# Altium PCB BRGTC6_Dual_Daughter.PcbDoc (part 1 of 2)
Units mil, origin at the board's own origin, x right, y up, seen from the top; angles counter-clockwise.
Board outline 5255 x 3080 mil, 4 copper layers (TOP, GND, PWR, BOT), stack 22.334 mil thick; 30 components, 45 nets, 287 pads, 36 vias.
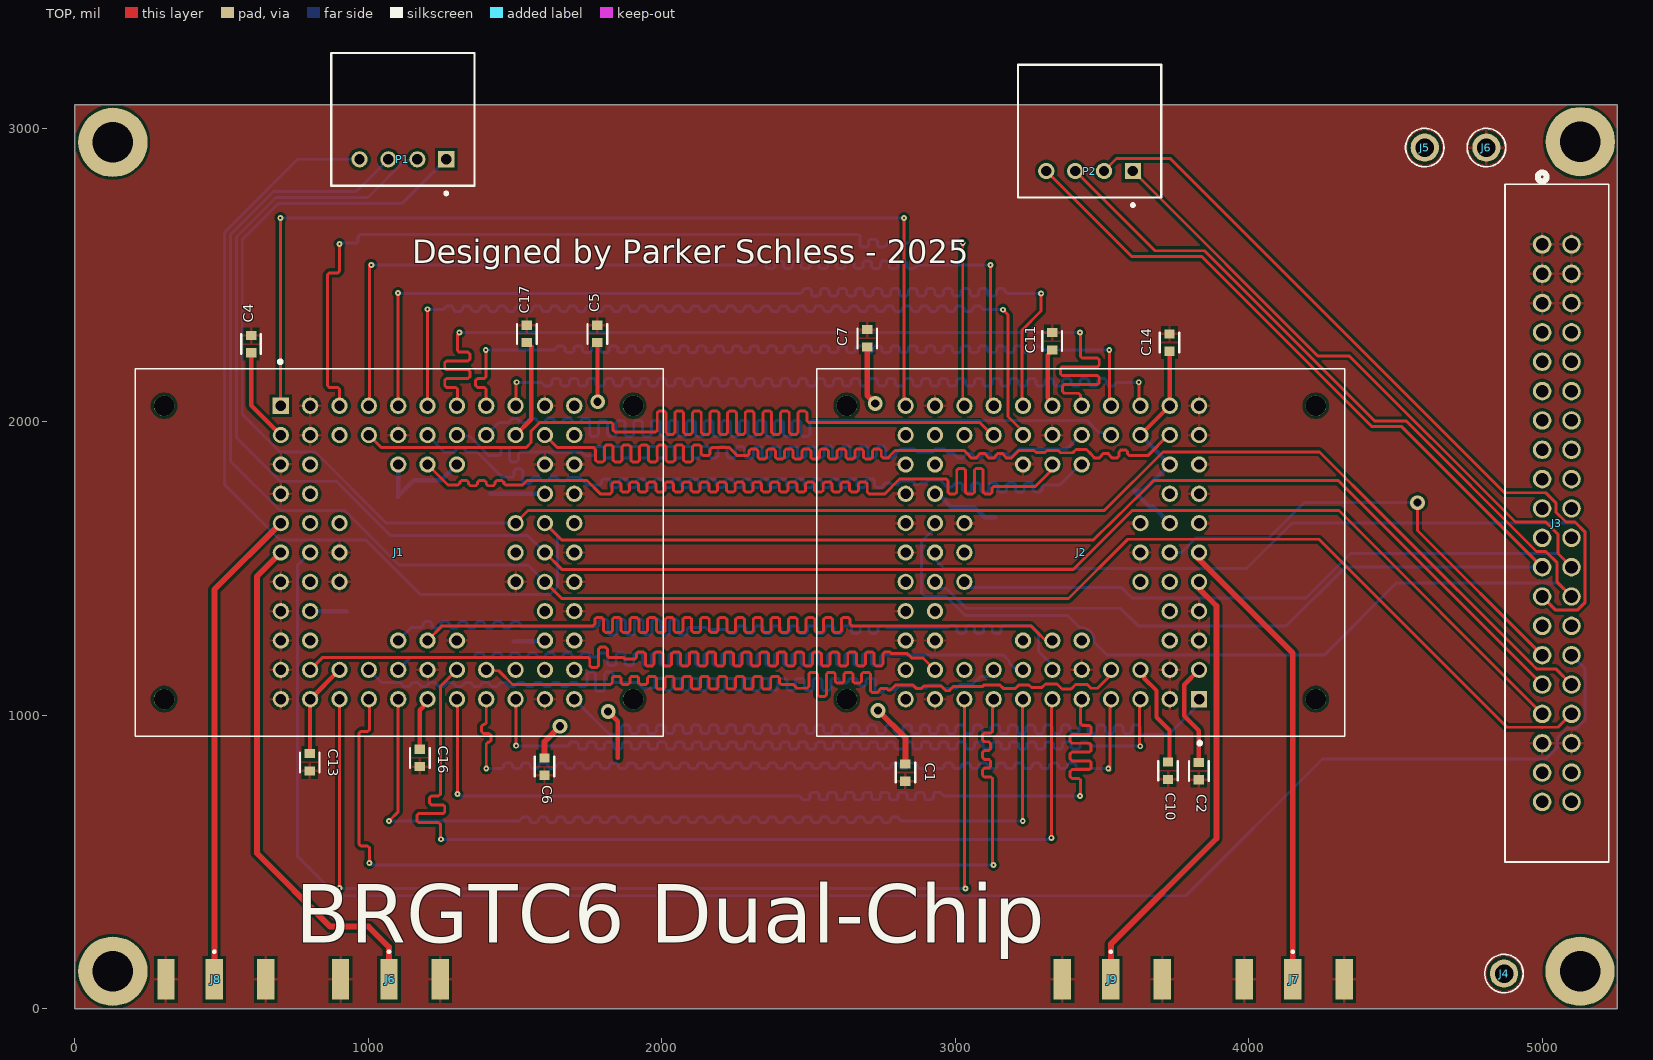
[diagram p0: TOP view]
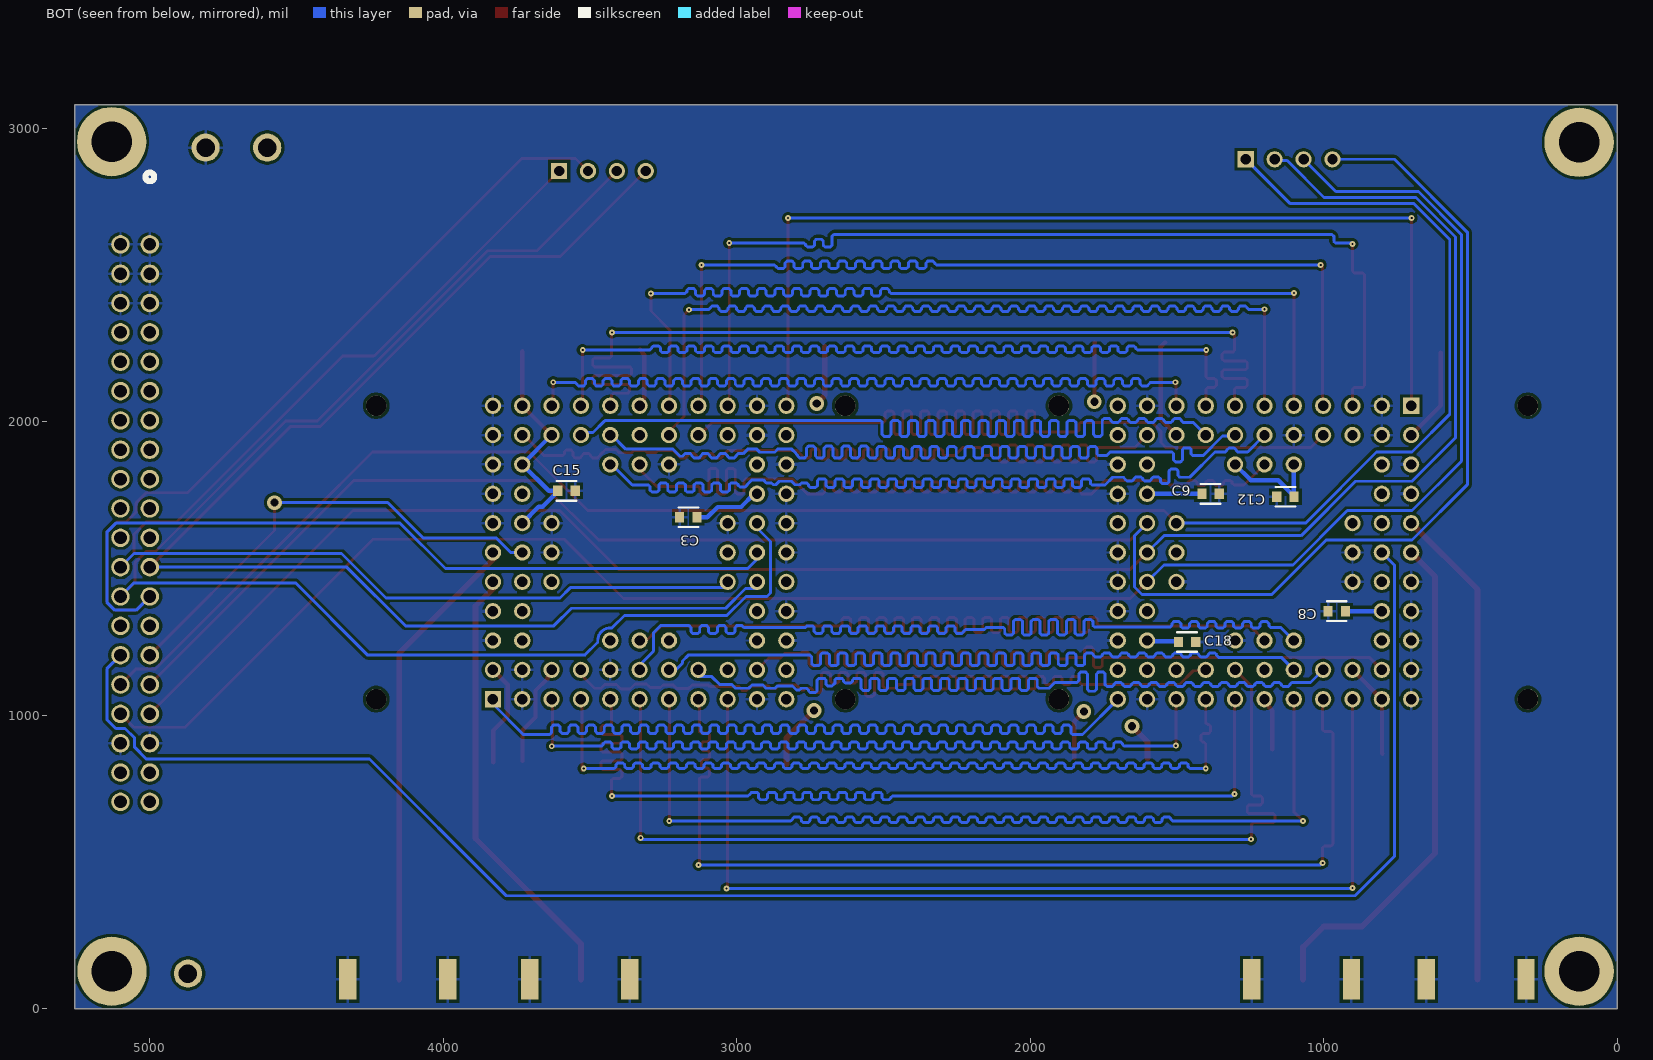
[diagram p1: BOT view, seen from below]
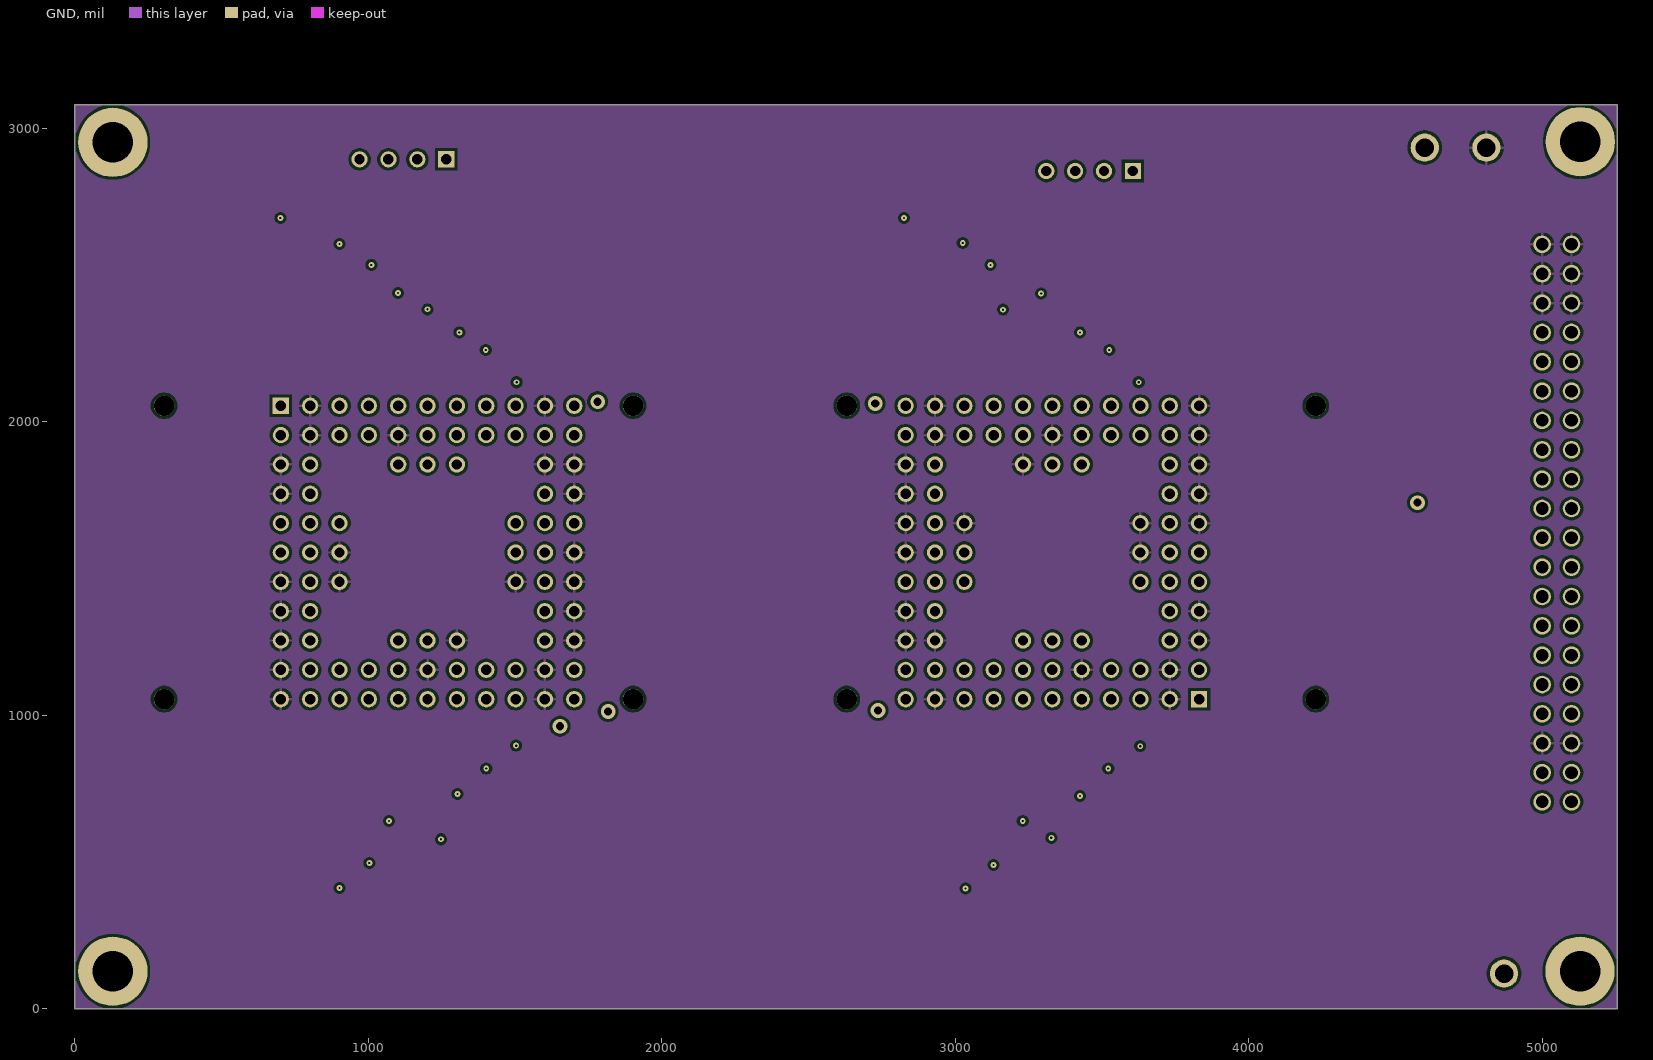
[diagram p2: GND]
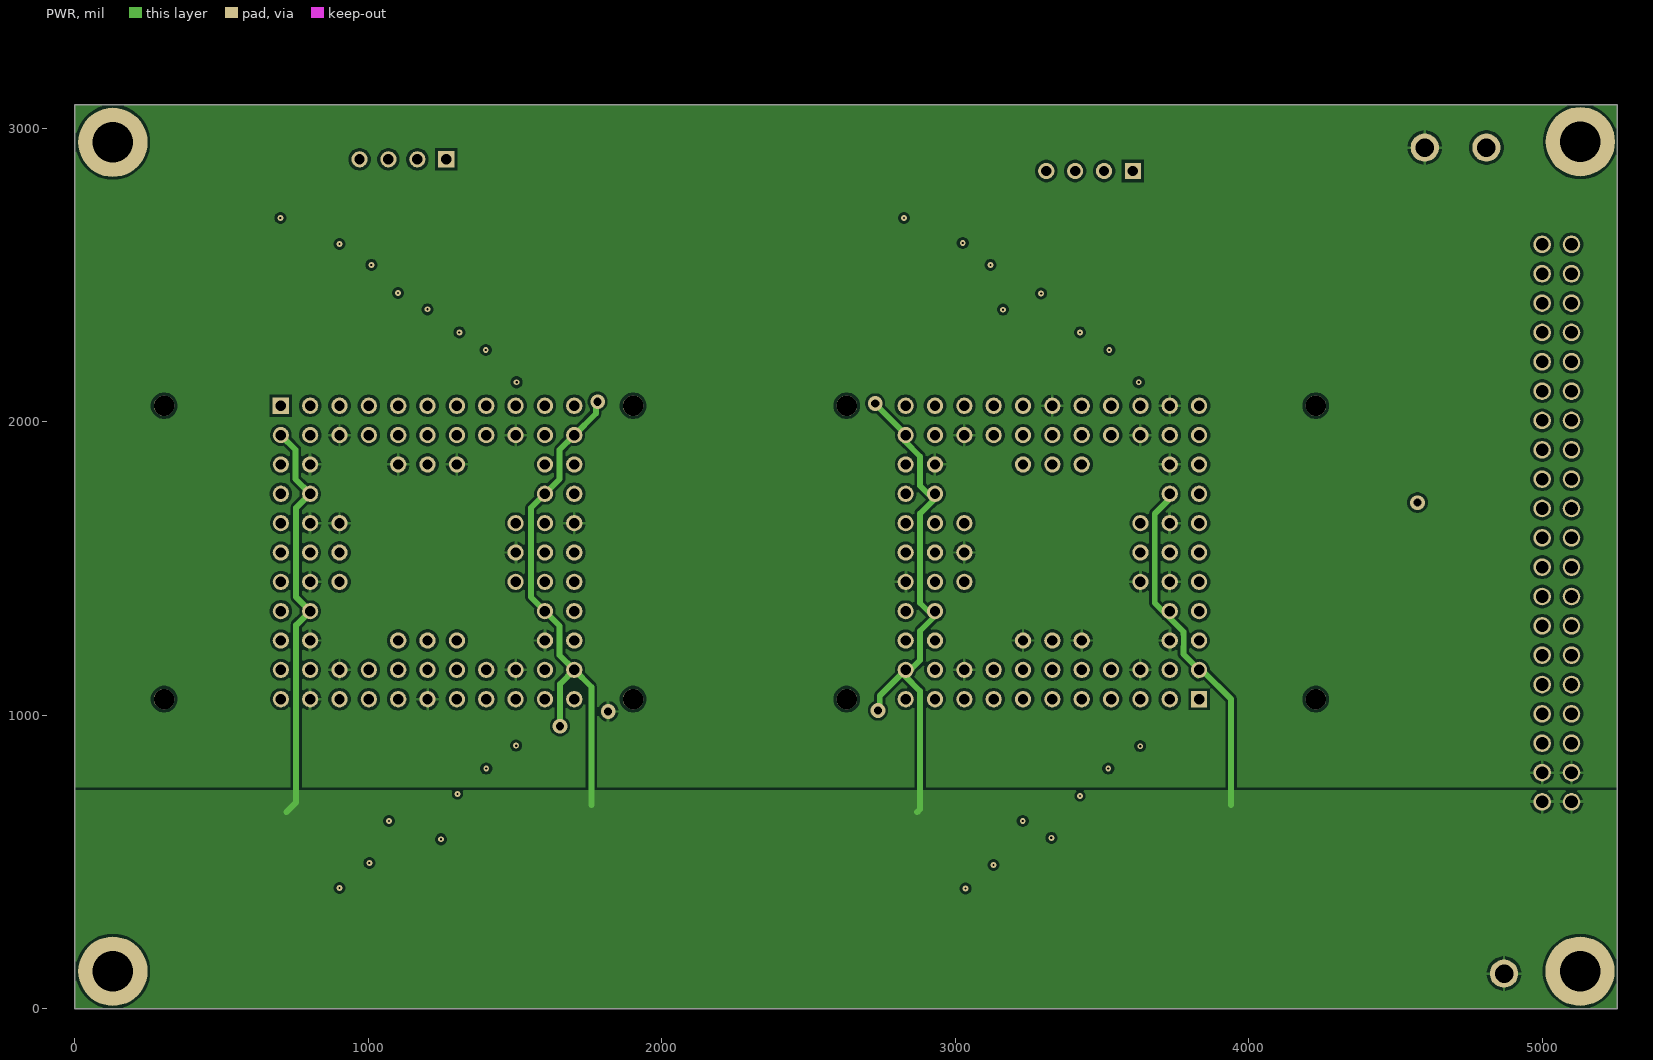
[diagram p3: PWR]
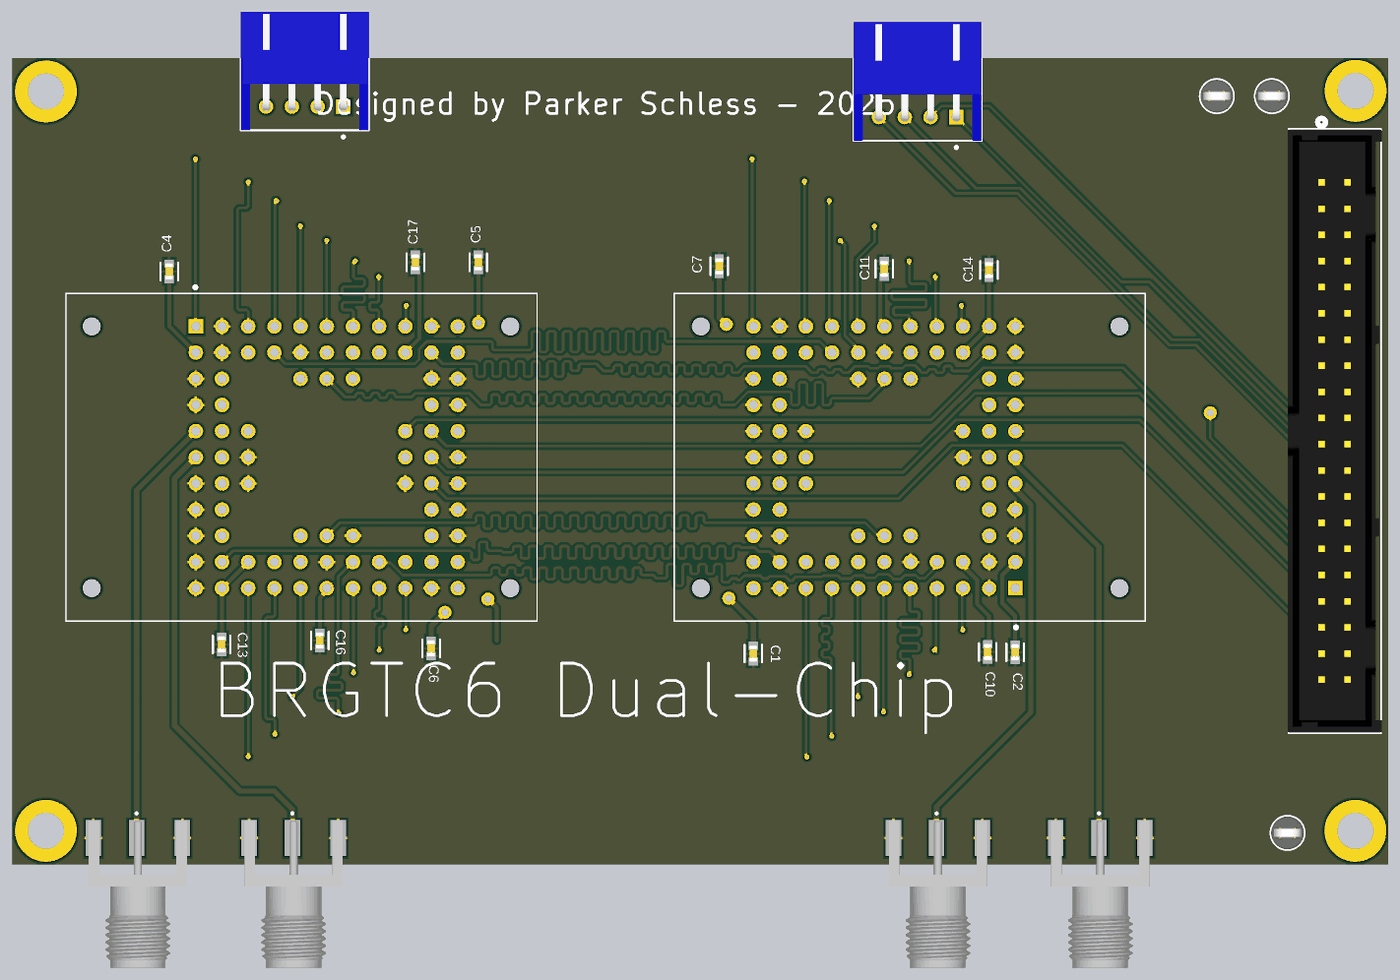
[diagram p5: 3D render of the assembled board from above, using the file's embedded part models]
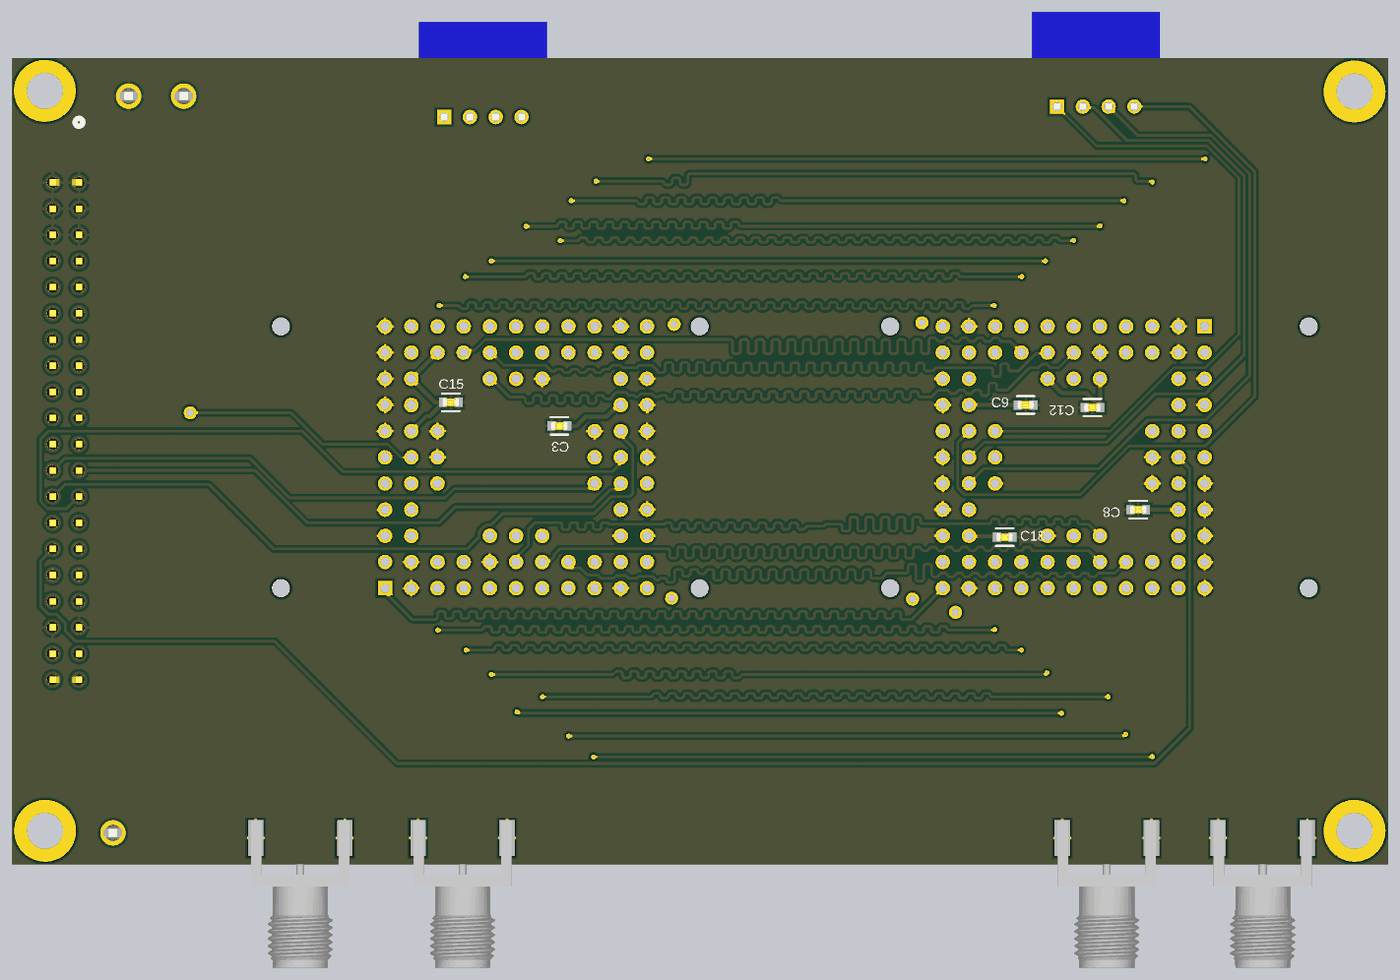
[diagram p6: 3D render of the assembled board from below, using the file's embedded part models]

## Layer stack, top to bottom
Top Solder: solder mask 0.4, Solder Resist, Dk 3.5
TOP: signal copper 1.378
Dielectric 2: prepreg 2.8, PP-006, Dk 4.1
GND: signal copper 0.689
Dielectric 1: dielectric 12.6, FR-4, Dk 4.8
PWR: signal copper 0.689
Dielectric 3: prepreg 2.8, PP-006, Dk 4.1
BOT: signal copper 1.378
Bottom Solder: solder mask 0.4, Solder Resist, Dk 3.5

## Board outline
0,0 0,3080 5255,3080 5255,0

## Design rules (kind name [scope] priority, off if disabled: settings)
Clearance [All] p1: gap=10 ignorepadtopadclearanceinfootprint=FALSE
HoleSize [All] p1: absolutevalues=TRUE maxlimit=150 minlimit=1 maxpercent=80.000 minpercent=20.000
MatchedLengths Credit-MatchedLengths [InNetClass('Credit')] p1: tolerance=50 checknetsindiffpair=FALSE checkdiffpairvsdiffpair=TRUE checkxsignals=TRUE checkothers=TRUE usedelayunits=TRUE delaytolerance=100.000000
PolygonConnect [All] p1: connectstyle=Relief reliefconductorwidth=10 reliefentries=4 polygonreliefangle="90 Angle" airgapwidth=10
RoutingVias [All] p1: holewidth=28 width=50 viastyle="Through Hole" minholewidth=28 minwidth=50 maxholewidth=28 maxwidth=50
SolderMaskExpansion [All] p1: expansion=4 istentingtop=FALSE
SupplyNets "Schematic Supply Nets_2" [InNet('GND')] p1: voltage=0.000
SupplyNets "Schematic Supply Nets_1" [InNet('+VCORE')] p2: voltage=0.000
SupplyNets "Schematic Supply Nets" [InNet('+VIO/CLK')] p3: voltage=0.000
Width [All] p1: maxlimit=20 minlimit=10 preferedwidth=10 minimp=50.000000 maximp=50.000000 favimp=50.000000
29 further rules are at their usual default settings.

## Classes and differential pairs
component class BRGTC6_Dual_Daughter: C1 C2 C4 C5 C6 C7 C8 C9 C10 C11 C12 C13 C14 C15 C16 C17 C18 J1 J2 J3 J4 J5 J6 J7 J8 J9 P1 P2

## Components (designator, comment, footprint, x,y, rotation, side; value= is the part's Value field where it differs from the comment)
C1 "0.1uF" FP-CC0603-DA-MFG 2830,805 r270 top value="100 nF"
C2 "0.1uF" FP-CC0603-DA-MFG 3830,810 r270 top value="100 nF"
C3 "0.1uF" FP-CC0603-DA-MFG 3165,1675 r0 bottom value="100 nF"
C4 "0.1uF" FP-CC0603-DA-MFG 600,2265 r90 top value="100 nF"
C5 "0.1uF" FP-CC0603-DA-MFG 1780,2300 r90 top value="100 nF"
C6 "0.1uF" FP-CC0603-DA-MFG 1600,825 r270 top value="100 nF"
C7 "0.1uF" FP-CC0603-DA-MFG 2700,2285 r90 top value="100 nF"
C8 "0.1uF" FP-CC0603-DA-MFG 955,1355 r0 bottom value="100 nF"
C9 "0.1uF" FP-CC0603-DA-MFG 1385,1755 r180 bottom value="100 nF"
C10 "0.1uF" FP-CC0603-DA-MFG 3725,811.22 r270 top value="100 nF"
C11 "0.1uF" FP-CC0603-DA-MFG 3330,2275 r90 top value="100 nF"
C12 "0.1uF" FP-CC0603-DA-MFG 1130,1745 r0 bottom value="100 nF"
C13 "0.1uF" FP-CC0603-DA-MFG 800,840 r270 top value="100 nF"
C14 "0.1uF" FP-CC0603-DA-MFG 3730,2270.47 r90 top value="100 nF"
C15 "0.1uF" FP-CC0603-DA-MFG 3580,1765 r180 bottom value="100 nF"
C16 "0.1uF" FP-CC0603-DA-MFG 1175,855 r270 top value="100 nF"
C17 "0.1uF" FP-CC0603-DA-MFG 1540,2300 r90 top value="100 nF"
C18 "0.1uF" FP-CC0603-DA-MFG 1465,1250 r180 bottom value="100 nF"
J1 "BRGTC6" 3M_200-6311-9UN-1900 1105,1555 r0 top
J2 "BRGTC6" 3M_200-6311-9UN-1900 3427.24,1555 r180 top
J3 "3020-40-0100-00" CONN_3020-40-0100-00_CNC 5000,2605 r270 top
J4 "5006" FP-5006-MFG 4870,120 r0 top
J5 "5006" FP-5006-MFG 4600,2935 r0 top
J6 "CON-SMA-EDGE-S" RFSOLUTIONS_CON-SMA-EDGE-S 1070,100 r90 top
J6 "5006" FP-5006-MFG 4810,2935 r0 top
J7 "CON-SMA-EDGE-S" RFSOLUTIONS_CON-SMA-EDGE-S 4150,100 r90 top
J8 "CON-SMA-EDGE-S" RFSOLUTIONS_CON-SMA-EDGE-S 475,100 r90 top
J9 "CON-SMA-EDGE-S" RFSOLUTIONS_CON-SMA-EDGE-S 3530,100 r90 top
P1 "S4B-XH-A(LF)(SN)" JST-S4B-XH-A(LF)(SN)_V 1117.36,2895 r180 top
P2 "S4B-XH-A(LF)(SN)" JST-S4B-XH-A(LF)(SN)_V 3457.64,2855 r180 top

## Footprints (in the part's own frame and the unit in brackets; to place one, negate y for a bottom-side part, rotate by r counter-clockwise, add the part's x,y. Pads: shape width x height; smd on the part's side, far side on the other; paste and mask are expansions set on the pad)
3M_200-6311-9UN-1900 [mm]
  rect 1.408x1.408 hole 0.9: A1(-10.25,12.7)
  round 1.408 hole 0.9: A2(-7.71,12.7) A3(-5.17,12.7) A4(-2.63,12.7) A5(-0.09,12.7) A6(2.45,12.7) A7(4.99,12.7) A8(7.53,12.7) A9(10.07,12.7) A10(12.61,12.7) A11(15.15,12.7) B1(-10.25,10.16) B2(-7.71,10.16) B3(-5.17,10.16) B4(-2.63,10.16) B5(-0.09,10.16) B6(2.45,10.16) B7(4.99,10.16) B8(7.53,10.16) B9(10.07,10.16) B10(12.61,10.16) B11(15.15,10.16) C1(-10.25,7.62) C2(-7.71,7.62) C5(-0.09,7.62) C6(2.45,7.62) C7(4.99,7.62) C10(12.61,7.62) C11(15.15,7.62) D1(-10.25,5.08) D2(-7.71,5.08) D10(12.61,5.08) D11(15.15,5.08) E1(-10.25,2.54) E2(-7.71,2.54) E3(-5.17,2.54) E9(10.07,2.54) E10(12.61,2.54) E11(15.15,2.54) F1(-10.25,0) F2(-7.71,0) F3(-5.17,0) F9(10.07,0) F10(12.61,0) F11(15.15,0) G1(-10.25,-2.54) G2(-7.71,-2.54) G3(-5.17,-2.54) G9(10.07,-2.54) G10(12.61,-2.54) G11(15.15,-2.54) H1(-10.25,-5.08) H2(-7.71,-5.08) H10(12.61,-5.08) H11(15.15,-5.08) J1(-10.25,-7.62) J2(-7.71,-7.62) J5(-0.09,-7.62) J6(2.45,-7.62) J7(4.99,-7.62) J10(12.61,-7.62) J11(15.15,-7.62) K1(-10.25,-10.16) K2(-7.71,-10.16) K3(-5.17,-10.16) K4(-2.63,-10.16) K5(-0.09,-10.16) K6(2.45,-10.16) K7(4.99,-10.16) K8(7.53,-10.16) K9(10.07,-10.16) K10(12.61,-10.16) K11(15.15,-10.16) L1(-10.25,-12.7) L2(-7.71,-12.7) L3(-5.17,-12.7) L4(-2.63,-12.7) L5(-0.09,-12.7) L6(2.45,-12.7) L7(4.99,-12.7) L8(7.53,-12.7) L9(10.07,-12.7) L10(12.61,-12.7) L11(15.15,-12.7)
  round 1.78 hole 1.78 unplated: ""(-20.35,-12.7) ""(-20.35,12.7) ""(20.25,-12.7) ""(20.25,12.7)
  silkscreen extent -22.85,-15.9 22.85,16.64
CONN_3020-40-0100-00_CNC [mil]
  round 63 / inner round 60 / far side round 63 hole 43 paste-99999 mask-31.5: 1(0,0) 2(0,100) 3(100,0) 4(100,100) 5(200,0) 6(200,100) 7(300,0) 8(300,100) 9(400,0) 10(400,100) 11(500,0) 12(500,100) 13(600,0) 14(600,100) 15(700,0) 16(700,100) 17(800,0) 18(800,100) 19(900,0) 20(900,100) 21(1000,0) 22(1000,100) 23(1100,0) 24(1100,100) 25(1200,0) 26(1200,100) 27(1300,0) 28(1300,100) 29(1400,0) 30(1400,100) 31(1500,0) 32(1500,100) 33(1600,0) 34(1600,100) 35(1700,0) 36(1700,100) 37(1800,0) 38(1800,100) 39(1900,0) 40(1900,100)
  silkscreen extent -245,-127 2105,227, body extent -200,-130 2100,230, height 390
FP-5006-MFG [mm]
  round 2.45 hole 1.6 paste-2539.97 mask+0: 1(0,0)
  silkscreen extent -1.66,-1.66 1.67,1.66, body extent -1.77,-1.77 1.77,1.77, height 0.25
FP-CC0603-DA-MFG [mm]
  rect 0.8x0.9 smd paste+0 mask+0: 1(-0.75,0) 2(0.75,0)
  silkscreen extent -0.85,-0.85 0.85,0.85, body extent -1.35,-0.75 1.35,0.75, height 0.25
JST-S4B-XH-A(LF)(SN)_V [mm] "Header, 4-Leads, Body 12.4x11.5mm, Pitch 2.5mm"
  rect 1.4x1.4 hole 0.9: 1(-3.75,0)
  round 1.4 hole 0.9: 2(-1.25,0) 3(1.25,0) 4(3.75,0)
  silkscreen extent -6.2,-9.2 6.2,3.08, body extent -6.2,-9.2 6.2,2.3, height 6.15
RFSOLUTIONS_CON-SMA-EDGE-S [mm]
  rect 3.5x1.5 smd: 1(0,0) G1(0,4.191) G2(0,-4.445)
  rect 3.5x1.5 smd far side: G3(0,4.191) G4(0,-4.445)
  silkscreen extent 2.3,-0.1 2.5,0.1, body extent -12.57,-4.89 1.7,4.64, height 4.34

## Part data
C1 C2 C3 C4 C5 C6 C7 C8 C9 C10 C11 C12 C13 C14 C15 C16 C17 C18: library part CMP-2000-05002-2, "CAP CER 0.1UF 16V X7R 0603", Capacitance="100 nF", Manufacturer=YAGEO, Manufacturer Part Number=CC0603KRX7R7BB104, Package=CC0603-DA, Temperature="-55°C to +125°C", Temperature Characteristic=X7R, Temperature Coefficient=15%, Temperature Range High=+125°C, Temperature Range Low=-55°C, Tolerance=0.1, Voltage="16 V", Automotive=No, Category=Cap, ComponentLink2Description=Datasheet, ComponentLink2URL=http://www.yageo.com/documents/recent/UPY-GPHC_X7R_6.3V-to-50V_18.pdf, Device Class L1="Passive Components", Device Class L2=Capacitors, Device Class L3="Ceramic Capacitors", Digikey Description="CAP CER 0.1UF 16V X7R 0603", Footprint Url=http://www.yageo.com/exep/pages/download/literatures/UPY-C_GEN_24.pdf, Height=0.9mm, Lead Free=Yes, Material=Ceramic, Mouser Description="Multilayer Ceramic Capacitor, CC Series, 0.1 - F, - 10%, X7R, 16 V, 0603 [1608 Metric]", Octopart=https://octopart.com/cc0603krx7r7bb104-yageo-192941, RoHS=TRUE, Voltage Rating="16 V"
J1 J2: library part 200-6311-9UN-1900, "121 _11 x 11_ Pos PGA, ZIF _ZIP_ Socket Gold Through Hole", Package=None, Digi-Key_Part_Number=3M5067-ND, Digi-Key_Purchase_URL=https://www.digikey.com/product-detail/en/3m/200-6311-9UN-1900/3M5067-ND/1130121?utm_source=snapeda&utm_medium=aggregator&utm_campaign=symbol, MF=3M, MP=200-6311-9UN-1900, SnapEDA_Link=https://www.snapeda.com/parts/200-6311-9UN-1900/3M%20_TC_/view-part/159310/?ref=snap
J3: "No Description Available", Mfr_Name="CNC Tech", RefDes=RefDes, Type=Type
J4 J5 J6: library part CMP-19636-000022-1, "PC TEST POINT COMPACT BLACK", Color=Black, Flammability Rating="UL94 V-0", Package Quantity=100, Body Material=Bronze, Contact Material=Bronze, Contact Plating=Tin, Height=0.35inch, Hole Diameter=1.6mm, Housing Color=Black, Inside Diameter=1.78mm, Insulation Material=Nylon, Lead Free="Lead Free", Length=8.89mm, Material=Nylon, Mount=PCB, Number of Ports=1, Orientation=Straight, Outside Diameter=3.18mm, Packaging=Bulk, Plating=Silver, REACH SVHC="No SVHC", RoHS Compliant=Yes, Series=THM
J6 J7 J8 J9: "SMA Connector Jack, Female Socket - Board Edge, End Launch Solder", Package=None, Check_prices=https://www.snapeda.com/parts/CON-SMA-EDGE-S/RF+Solutions/view-part/?ref=eda, Digi-Key_Part_Number=CON-SMA-EDGE-S-ND, MF="RF Solutions", MP=CON-SMA-EDGE-S, Purchase-URL=https://pricing.snapeda.com/search/part/CON-SMA-EDGE-S/?ref=eda, SnapEDA_Link=https://www.snapeda.com/parts/CON-SMA-EDGE-S/RF+Solutions/view-part/?ref=snap
P1 P2: library part CMP-1755-00007-1, "Male Header, Pitch 2.5 mm, 1 x 4 Position, Height 6.1 mm, Tail Length 3.4 mm, -25 to 85 degC, RoHS, Bulk", ComponentLink1Description="Manufacturer URL", ComponentLink1URL=http://www.jst.com/home2.html, ComponentLink2Description=Datasheet, ComponentLink2URL=http://www.jst-mfg.com/product/pdf/eng/eXH.pdf, DatasheetVersion=May-16, PackageDescription="Male Header, Pitch 2.5 mm, 1 x 4 Position, Height 6.1 mm, Tail Length 3.4 mm", PackageReference=S4B-XH-A(LF)(SN)

## Free pads (board coordinates)
  round 236.22 hole 137.8: 2(129.12,127.84) 2(129.12,2952.84) 2(5129.12,127.84) 2(5130,2955)

## Via types
v1: diameter 19.68, hole 7.87, TOP to BOT, 30 vias
v2: diameter 50, hole 28, TOP to BOT, 6 vias

## Nets (pads, with @x,y where several pads share a name; then routed paths per layer and width w, separated by ;. In a path a pad name is that pad's centre, name@x,y a point inside that pad or via, vN(x,y) a via of type N, cw(c..) or ccw(c..) an arc to the next point about the centre after c; other vN are vias at no path point)
+VCORE: C1.1 C2.1 C3.1 C4.1 C5.1 C6.1 C7.1 C8.1 C9.1 J1.B1 J1.B11 J1.D2 J1.D10 J1.H2 J1.H10 J1.K11 J2.B1 J2.B11 J2.D2 J2.D10 J2.H2 J2.H10 J2.K11 J3.39 J3.40 J4.1 | length 8088.9
  TOP w15: C4.1@600,2235.47 600,2056.46 J1.B1@701.46,1955 ; C5.1@1780,2270.47 1780.53,2269.94 1780.53,2069.47 v2(1781.07,2068.93) ; C2.1@3830,839.53 3830,948.02 3780,998.02 3780,1104.21 J2.B1@3830.79,1155
  TOP w20: C6.1@1600,854.53 1600,910 v2(1652.79,962.79) ; C7.1@2700,2255.47 2700,2090 v2(2727.05,2062.95) ; v2(2736.68,1016.68) 2830,923.36 C1.1@2830,834.53
  PWR w20: J1.B1@701.46,1955 751.46,1905 751.46,1805 J1.D2@801.46,1755 753.74,1707.28 753.74,1402.72 J1.H2@801.46,1355 753.74,1307.28 753.74,703.74 720,670 ; v2(1652.79,962.79) 1652.79,1106.34 J1.K11@1701.46,1155 ; 1760,695 1760,1096.46 J1.K11@1701.46,1155 ; v2(1781.07,2068.93) 1775.33,2063.19 1775.33,2028.87 J1.B11@1701.46,1955 1651.46,1905 1651.46,1805 J1.D10@1601.46,1755 1553.74,1707.28 1553.74,1402.72 J1.H10@1601.46,1355 1651.46,1305 1651.46,1205 J1.K11@1701.46,1155 ; v2(2727.05,2062.95) 2727.05,2060.85 2830.79,1957.11 J2.K11@2830.79,1955 ; v2(2736.68,1016.68) 2742.42,1022.42 2742.42,1066.63 J2.B11@2830.79,1155 ; J2.K11@2827.36,1935 2880,1882.36 2880,1782.36 2927.36,1735 2879.65,1687.28 2879.65,1382.72 2927.36,1335 2880,1287.64 2880,1187.64 2827.36,1135 2880,1082.36 2880,680 2870,670 ; J2.H2@3727.36,1735 3679.65,1687.28 3679.65,1382.72 3777.36,1285 3777.36,1275.91 3778.5,1274.76 3778.5,1235.24 3777.36,1234.09 3777.36,1208.43 J2.B1@3830.79,1155 J2.B1@3830.79,1144.21 ; J2.B1@3825.07,1137.29 3827.36,1135 3843.68,1151.32 3940,1055 3940,695
  BOT w15: J1.H2@801.46,1355 C8.1@925.47,1355 ; C9.1@1414.53,1755 J1.D10@1601.46,1755 ; J2.H10@2930.79,1755 2940,1755 2985,1710 3064.97,1710 3099.97,1675 C3.1@3135.47,1675
+VIO/CLK: C10.1 C11.1 C12.1 C13.1 C14.1 C15.1 C16.1 C17.1 C18.1 J1.B3 J1.B9 J1.C2 J1.C5 J1.C7 J1.E2 J1.E3 J1.E11 J1.F9 J1.G2 J1.J2 J1.J10 J1.K3 J1.K9 J1.L2 J1.L6 J2.B3 J2.B9 J2.C2 J2.C5 J2.C7 J2.E2 J2.E3 J2.E11 J2.F9 J2.G2 J2.J2 J2.J10 J2.K3 J2.K9 J2.L2 J2.L6 J3.37 J3.38 J5.1 | length 2865.9
  TOP w15: C13.1@800,869.53 800.73,870.26 800.73,1054.27 J1.L2@801.46,1055 J1.K3@901.46,1155 ; C16.1@1175,884.53 1175,1017.6 1201.46,1044.06 J1.L6@1201.46,1055 ; J1.B9@1501.46,1955 1555.07,2008.62 1555.07,2255.4 1550.22,2260.26 1550.22,2262.22 C17.1@1541.97,2270.47 ; C17.1@1540,2270.47 C17.1@1541.97,2270.47 ; C17.1@1556.06,2256.38 C17.1@1541.97,2270.47 ; v2(1816.85,1013.15) 1850,980 1850,854.53 ; C11.1@3330,2245.47 3328.03,2245.47 3319.78,2237.22 3319.78,2233.22 3315,2228.44 3315,2081.73 3330.39,2066.34 J2.L6@3330.39,2055.39 ; J2.B3@3630.79,1155 3630.79,1144.06 3643.4,1131.44 3643.4,1126.6 3685.57,1084.43 3685.57,993.81 3730,949.38 C10.1@3730,844.53 ; J2.K3@3630.79,1955 J2.L2@3730,2054.21 ; C14.1@3730,2240.94 3730.39,2240.55 3730.39,2055.39 J2.L2@3730.79,2055
  PWR w15: v2@1815,1015 v2(1816.85,1013.15)
  BOT w15: J1.C5@1101.46,1855 1100.96,1854.51 1100.96,1745.49 C12.1@1100.47,1745 1100.47,1746.97 1154.74,1801.24 1247.7,1801.24 J1.C7@1301.46,1855 ; C18.1@1494.53,1250 1497.03,1252.5 1598.96,1252.5 J1.J10@1601.46,1255 ; J2.K3@3630.79,1955 J2.J2@3730.79,1855 3640.79,1765 C15.1@3609.53,1765 3609.53,1763.03 3661.06,1711.5 3674.29,1711.5 J2.G2@3730.79,1655
CLK_0: J1.F1 J6.1@1070,100 | length 1751.3
  TOP w20: J1.F1@701.46,1555 620,1473.54 620,530 870,280 1000,280 1070,210 J6.1@1070,100
CLK_0_DBG: J1.E1 J8.1 | length 1648.8
  TOP w20: J8.1@475,100 475,1428.54 J1.E1@701.46,1655
CLK_1: J2.F1 J7.1 | length 1568.6
  TOP w20: J2.F1@3827.36,1535 4150,1212.36 J7.1@4150,100
CLK_1_DBG: J2.E1 J9.1 | length 1510.1
  TOP w20: J9.1@3530,100 3530,220 3890,580 3890,1372.36 J2.E1@3827.36,1435
CRED_CLK_0_1: J1.B7 J2.K5 | length 3416.9
  BOT w10: J1.B7@1301.46,1955 1304.58,1951.87 1344.17,1951.87 1411.05,1885 1445.05,1885 1451.05,1891 1451.05,1905.75 1457.05,1911.75 1475.05,1911.75 1481.05,1905.75 1481.05,1870 1487.05,1864 1505.05,1864 1511.05,1870 1511.05,1891.86 1516.9,1897.72 1727.28,1897.72 1740,1885 1765.87,1885 1771.87,1891 1771.87,1910 1777.87,1916 1795.87,1916 1801.87,1910 1801.87,1883.72 1807.87,1877.72 1825.87,1877.72 1831.87,1883.72 1831.87,1910 1837.87,1916 1855.87,1916 1861.87,1910 1861.87,1883.72 1867.87,1877.72 1885.87,1877.72 1891.87,1883.72 1891.87,1910 1897.87,1916 1915.87,1916 1921.87,1910 1921.87,1883.72 1927.87,1877.72 1945.87,1877.72 1951.87,1883.72 1951.87,1910 1957.87,1916 1975.87,1916 1981.87,1910 1981.87,1883.72 1987.87,1877.72 2005.87,1877.72 2011.87,1883.72 2011.87,1910 2017.87,1916 2035.87,1916 2041.87,1910 2041.87,1883.72 2047.87,1877.72 2065.87,1877.72 2071.87,1883.72 2071.87,1910 2077.87,1916 2095.87,1916 2101.87,1910 2101.87,1883.72 2107.87,1877.72 2125.87,1877.72 2131.87,1883.72 2131.87,1910 2137.87,1916 2155.87,1916 2161.87,1910 2161.87,1883.72 2167.87,1877.72 2185.87,1877.72 2191.87,1883.72 2191.87,1910 2197.87,1916 2215.87,1916 2221.87,1910 2221.87,1883.72 2227.87,1877.72 2245.87,1877.72 2251.87,1883.72 2251.87,1910 2257.87,1916 2275.87,1916 2281.87,1910 2281.87,1883.72 2287.87,1877.72 2305.87,1877.72 2311.87,1883.72 2311.87,1910 2317.87,1916 2335.87,1916 2341.87,1910 2341.87,1883.72 2347.87,1877.72 2365.87,1877.72 2371.87,1883.72 2371.87,1910 2377.87,1916 2395.87,1916 2401.87,1910 2401.87,1883.72 2407.87,1877.72 2425.87,1877.72 2431.87,1883.72 2431.87,1910 2437.87,1916 2455.87,1916 2461.87,1910 2461.87,1883.72 2467.87,1877.72 2485.87,1877.72 2491.87,1883.72 2491.87,1910 2497.87,1916 2515.87,1916 2521.87,1910 2521.87,1883.72 2527.87,1877.72 2545.87,1877.72 2551.87,1883.72 2551.87,1911.37 2557.87,1917.37 2575.87,1917.37 2581.87,1911.37 2581.87,1883.72 2587.87,1877.72 2605.87,1877.72 2611.87,1883.72 2611.87,1911.37 2617.87,1917.37 2635.87,1917.37 2641.87,1911.37 2641.87,1883.72 2647.87,1877.72 2665.87,1877.72 2671.87,1883.72 2671.87,1911.37 2677.87,1917.37 2695.87,1917.37 2701.87,1911.37 2701.87,1883.72 2707.87,1877.72 2725.87,1877.72 2731.87,1883.72 2731.87,1911.37 2737.87,1917.37 2755.87,1917.37 2761.87,1911.37 2761.87,1883.72 2767.87,1877.72 2785.87,1877.72 2791.87,1883.72 2791.87,1885.78 2797.87,1891.78 2797.87,1892.87 2812.08,1907.08 2860.57,1907.08 2868.12,1899.53 2871.05,1896.6 2921.08,1896.6 2931.56,1907.08 2962.57,1907.08 2977.87,1891.78 2995.87,1891.78 3001.87,1885.78 3001.87,1883.72 3007.87,1877.72 3025.87,1877.72 3031.87,1883.72 3031.87,1885.78 3037.87,1891.78 3055.87,1891.78 3061.87,1885.78 3061.87,1883.72 3067.87,1877.72 3085.87,1877.72 3091.87,1883.72 3091.87,1885.78 3097.87,1891.78 3115.87,1891.78 3121.87,1885.78 3121.87,1883.72 3127.87,1877.72 3145.87,1877.72 3151.87,1883.72 3151.87,1885.78 3157.87,1891.78 3175.87,1891.78 3184.76,1882.89 3193.04,1882.89 3217.23,1907.08 3377.87,1907.08 J2.K5@3425.79,1955
CRED_CLK_1_0: J1.K5 J2.B7 | length 3417.2
  BOT w10: J1.K5@1101.46,1155 1144.17,1197.72 1358.17,1197.72 1364.17,1203.72 1364.17,1206.28 1370.17,1212.28 1388.17,1212.28 1394.17,1206.28 1394.17,1204.53 1400.17,1198.53 1418.17,1198.53 1424.17,1204.53 1424.17,1206.28 1430.17,1212.28 1448.17,1212.28 1454.17,1206.28 1454.17,1204.53 1460.17,1198.53 1478.17,1198.53 1484.17,1204.53 1484.17,1206.28 1490.17,1212.28 1508.17,1212.28 1514.17,1206.28 1514.17,1204.53 1520.17,1198.53 1538.17,1198.53 1544.17,1204.53 1544.17,1206.28 1550.17,1212.28 1568.17,1212.28 1574.17,1206.28 1574.17,1204.53 1580.17,1198.53 1598.17,1198.53 1604.17,1204.53 1604.17,1206.28 1610.17,1212.28 1628.17,1212.28 1634.17,1206.28 1634.17,1204.53 1640.17,1198.53 1658.17,1198.53 1664.17,1204.53 1664.17,1206.28 1670.17,1212.28 1688.17,1212.28 1694.17,1206.28 1694.17,1204.53 1700.17,1198.53 1718.17,1198.53 1724.17,1204.53 1724.17,1206.28 1730.17,1212.28 1748.17,1212.28 1754.17,1206.28 1754.17,1204.53 1760.17,1198.53 1778.17,1198.53 1784.17,1204.53 1784.17,1206.28 1790.17,1212.28 1808.17,1212.28 1814.17,1206.28 1814.17,1175.45 1820.17,1169.45 1838.17,1169.45 1844.17,1175.45 1844.17,1206.28 1850.17,1212.28 1868.17,1212.28 1874.17,1206.28 1874.17,1175.45 1880.17,1169.45 1898.17,1169.45 1904.17,1175.45 1904.17,1206.28 1910.17,1212.28 1928.17,1212.28 1934.17,1206.28 1934.17,1175.45 1940.17,1169.45 1958.17,1169.45 1964.17,1175.45 1964.17,1206.28 1970.17,1212.28 1988.17,1212.28 1994.17,1206.28 1994.17,1175.45 2000.17,1169.45 2018.17,1169.45 2024.17,1175.45 2024.17,1206.28 2030.17,1212.28 2048.17,1212.28 2054.17,1206.28 2054.17,1175.45 2060.17,1169.45 2078.17,1169.45 2084.17,1175.45 2084.17,1206.28 2090.17,1212.28 2108.17,1212.28 2114.17,1206.28 2114.17,1175.45 2120.17,1169.45 2138.17,1169.45 2144.17,1175.45 2144.17,1206.28 2150.17,1212.28 2168.17,1212.28 2174.17,1206.28 2174.17,1175.45 2180.17,1169.45 2198.17,1169.45 2204.17,1175.45 2204.17,1206.28 2210.17,1212.28 2228.17,1212.28 2234.17,1206.28 2234.17,1175.45 2240.17,1169.45 2258.17,1169.45 2264.17,1175.45 2264.17,1206.28 2270.17,1212.28 2288.17,1212.28 2294.17,1206.28 2294.17,1175.45 2300.17,1169.45 2318.17,1169.45 2324.17,1175.45 2324.17,1206.28 2330.17,1212.28 2348.17,1212.28 2354.17,1206.28 2354.17,1175.45 2360.17,1169.45 2378.17,1169.45 2384.17,1175.45 2384.17,1206.28 2390.17,1212.28 2408.17,1212.28 2414.17,1206.28 2414.17,1175.45 2420.17,1169.45 2438.17,1169.45 2444.17,1175.45 2444.17,1206.28 2450.17,1212.28 2468.17,1212.28 2474.17,1206.28 2474.17,1175.45 2480.17,1169.45 2498.17,1169.45 2504.17,1175.45 2504.17,1206.28 2510.17,1212.28 2528.17,1212.28 2534.17,1206.28 2534.17,1175.45 2540.17,1169.45 2558.17,1169.45 2564.17,1175.45 2564.17,1206.28 2570.17,1212.28 2588.17,1212.28 2594.17,1206.28 2594.17,1175.45 2600.17,1169.45 2618.17,1169.45 2624.17,1175.45 2624.17,1206.28 2630.17,1212.28 2648.17,1212.28 2654.17,1206.28 2654.17,1175.45 2660.17,1169.45 2678.17,1169.45 2684.17,1175.45 2684.17,1206.28 2690.17,1212.28 2708.17,1212.28 2714.17,1206.28 2714.17,1175.45 2720.17,1169.45 2738.17,1169.45 2744.17,1175.45 2744.17,1199.14 2750.03,1205 3165,1205 3184.65,1185.35 3184.65,1177.72 J2.B7@3227.36,1135
CRED_CRC_0_1: J1.A9 J2.L3 | length 3406.9
  TOP w10: J1.A9@1501.46,2055 1503.23,2056.77 1503.23,2133.23 v1(1505,2135) ; v1@3625.39,2134.61 3625.39,2055.39 J2.L3@3625.79,2055
  BOT w10: v1(1505,2135) 1589,2135 1595,2129 1595,2128.79 1601,2122.79 1619,2122.79 1625,2128.79 1625,2141.24 1631,2147.24 1649,2147.24 1655,2141.24 1655,2128.79 1661,2122.79 1679,2122.79 1685,2128.79 1685,2141.24 1691,2147.24 1709,2147.24 1715,2141.24 1715,2128.79 1721,2122.79 1739,2122.79 1745,2128.79 1745,2141.24 1751,2147.24 1769,2147.24 1775,2141.24 1775,2128.79 1781,2122.79 1799,2122.79 1805,2128.79 1805,2141.24 1811,2147.24 1829,2147.24 1835,2141.24 1835,2128.79 1841,2122.79 1859,2122.79 1865,2128.79 1865,2141.24 1871,2147.24 1889,2147.24 1895,2141.24 1895,2128.79 1901,2122.79 1919,2122.79 1925,2128.79 1925,2141.24 1931,2147.24 1949,2147.24 1955,2141.24 1955,2128.79 1961,2122.79 1979,2122.79 1985,2128.79 1985,2141.24 1991,2147.24 2009,2147.24 2015,2141.24 2015,2128.79 2021,2122.79 2039,2122.79 2045,2128.79 2045,2141.24 2051,2147.24 2069,2147.24 2075,2141.24 2075,2128.79 2081,2122.79 2099,2122.79 2105,2128.79 2105,2141.24 2111,2147.24 2129,2147.24 2135,2141.24 2135,2128.79 2141,2122.79 2159,2122.79 2165,2128.79 2165,2141.24 2171,2147.24 2189,2147.24 2195,2141.24 2195,2128.79 2201,2122.79 2219,2122.79 2225,2128.79 2225,2141.24 2231,2147.24 2249,2147.24 2255,2141.24 2255,2128.79 2261,2122.79 2279,2122.79 2285,2128.79 2285,2141.24 2291,2147.24 2309,2147.24 2315,2141.24 2315,2128.79 2321,2122.79 2339,2122.79 2345,2128.79 2345,2141.24 2351,2147.24 2369,2147.24 2375,2141.24 2375,2128.79 2381,2122.79 2399,2122.79 2405,2128.79 2405,2141.24 2411,2147.24 2429,2147.24 2435,2141.24 2435,2128.79 2441,2122.79 2459,2122.79 2465,2128.79 2465,2141.24 2471,2147.24 2489,2147.24 2495,2141.24 2495,2128.79 2501,2122.79 2519,2122.79 2525,2128.79 2525,2141.24 2531,2147.24 2549,2147.24 2555,2141.24 2555,2128.79 2561,2122.79 2579,2122.79 2585,2128.79 2585,2141.24 2591,2147.24 2609,2147.24 2615,2141.24 2615,2128.79 2621,2122.79 2639,2122.79 2645,2128.79 2645,2141.24 2651,2147.24 2669,2147.24 2675,2141.24 2675,2128.79 2681,2122.79 2699,2122.79 2705,2128.79 2705,2141.24 2711,2147.24 2729,2147.24 2735,2141.24 2735,2128.79 2741,2122.79 2759,2122.79 2765,2128.79 2765,2141.24 2771,2147.24 2789,2147.24 2795,2141.24 2795,2128.79 2801,2122.79 2819,2122.79 2825,2128.79 2825,2141.24 2831,2147.24 2849,2147.24 2855,2141.24 2855,2128.79 2861,2122.79 2879,2122.79 2885,2128.79 2885,2141.24 2891,2147.24 2909,2147.24 2915,2141.24 2915,2128.79 2921,2122.79 2939,2122.79 2945,2128.79 2945,2141.24 2951,2147.24 2969,2147.24 2975,2141.24 2975,2128.79 2981,2122.79 2999,2122.79 3005,2128.79 3005,2141.24 3011,2147.24 3029,2147.24 3035,2141.24 3035,2128.79 3041,2122.79 3059,2122.79 3065,2128.79 3065,2141.24 3071,2147.24 3089,2147.24 3095,2141.24 3095,2128.79 3101,2122.79 3119,2122.79 3125,2128.79 3125,2141.24 3131,2147.24 3149,2147.24 3155,2141.24 3155,2128.79 3161,2122.79 3179,2122.79 3185,2128.79 3185,2141.24 3191,2147.24 3209,2147.24 3215,2141.24 3215,2128.79 3221,2122.79 3239,2122.79 3245,2128.79 3245,2141.24 3251,2147.24 3269,2147.24 3275,2141.24 3275,2128.79 3281,2122.79 3299,2122.79 3305,2128.79 3305,2141.24 3311,2147.24 3329,2147.24 3335,2141.24 3335,2128.79 3341,2122.79 3359,2122.79 3365,2128.79 3365,2141.24 3371,2147.24 3389,2147.24 3395,2141.24 3395,2128.79 3401,2122.79 3419,2122.79 3425,2128.79 3425,2141.24 3431,2147.24 3449,2147.24 3455,2141.24 3455,2128.79 3461,2122.79 3479,2122.79 3485,2128.79 3485,2141.24 3491,2147.24 3509,2147.24 3515,2141.24 3515,2128.79 3521,2122.79 3539,2122.79 3545,2128.79 3545,2129 3551,2135 v1(3625,2135) v1@3625.39,2134.61
CRED_CRC_1_0: J1.L3 J2.A9 | length 3408.8
  TOP w10: v1(901.46,411.46) J1.L3@901.46,1055 ; J2.A9@3027.36,1035 3031.18,1031.18 v1@3031.18,413.82
  BOT w10: v1(901.46,411.46) 900,410 v1(3035,410) v1@3031.18,413.82
CRED_CRED_0_1: J1.A8 J2.L4 | length 3406.1
  TOP w10: v1(1400,2245) 1400.73,2244.27 1400.73,2153.72 1394.73,2147.72 1371.55,2147.72 1365.55,2141.72 1365.55,2123.72 1371.55,2117.72 1394.73,2117.72 1400.73,2111.72 1400.73,2055.73 J1.A8@1401.46,2055 ; J2.L4@3525.79,2055 v1@3525.79,2244.21
  BOT w10: v1(1400,2245) 1634,2245 1640,2251 1640,2252.53 1646,2258.53 1664,2258.53 1670,2252.53 1670,2242.11 1676,2236.11 1694,2236.11 1700,2242.11 1700,2252.53 1706,2258.53 1724,2258.53 1730,2252.53 1730,2242.11 1736,2236.11 1754,2236.11 1760,2242.11 1760,2252.53 1766,2258.53 1784,2258.53 1790,2252.53 1790,2242.11 1796,2236.11 1814,2236.11 1820,2242.11 1820,2252.53 1826,2258.53 1844,2258.53 1850,2252.53 1850,2242.11 1856,2236.11 1874,2236.11 1880,2242.11 1880,2252.53 1886,2258.53 1904,2258.53 1910,2252.53 1910,2242.11 1916,2236.11 1934,2236.11 1940,2242.11 1940,2252.53 1946,2258.53 1964,2258.53 1970,2252.53 1970,2242.11 1976,2236.11 1994,2236.11 2000,2242.11 2000,2252.53 2006,2258.53 2024,2258.53 2030,2252.53 2030,2242.11 2036,2236.11 2054,2236.11 2060,2242.11 2060,2252.53 2066,2258.53 2084,2258.53 2090,2252.53 2090,2242.11 2096,2236.11 2114,2236.11 2120,2242.11 2120,2252.53 2126,2258.53 2144,2258.53 2150,2252.53 2150,2242.11 2156,2236.11 2174,2236.11 2180,2242.11 2180,2252.53 2186,2258.53 2204,2258.53 2210,2252.53 2210,2242.11 2216,2236.11 2234,2236.11 2240,2242.11 2240,2252.53 2246,2258.53 2264,2258.53 2270,2252.53 2270,2242.11 2276,2236.11 2294,2236.11 2300,2242.11 2300,2252.53 2306,2258.53 2324,2258.53 2330,2252.53 2330,2242.11 2336,2236.11 2354,2236.11 2360,2242.11 2360,2252.53 2366,2258.53 2384,2258.53 2390,2252.53 2390,2242.11 2396,2236.11 2414,2236.11 2420,2242.11 2420,2252.53 2426,2258.53 2444,2258.53 2450,2252.53 2450,2242.11 2456,2236.11 2474,2236.11 2480,2242.11 2480,2252.53 2486,2258.53 2504,2258.53 2510,2252.53 2510,2242.11 2516,2236.11 2534,2236.11 2540,2242.11 2540,2252.53 2546,2258.53 2564,2258.53 2570,2252.53 2570,2242.11 2576,2236.11 2594,2236.11 2600,2242.11 2600,2252.53 2606,2258.53 2624,2258.53 2630,2252.53 2630,2242.11 2636,2236.11 2654,2236.11 2660,2242.11 2660,2252.53 2666,2258.53 2684,2258.53 2690,2252.53 2690,2242.11 2696,2236.11 2714,2236.11 2720,2242.11 2720,2252.53 2726,2258.53 2744,2258.53 2750,2252.53 2750,2242.11 2756,2236.11 2774,2236.11 2780,2242.11 2780,2252.53 2786,2258.53 2804,2258.53 2810,2252.53 2810,2242.11 2816,2236.11 2834,2236.11 2840,2242.11 2840,2252.53 2846,2258.53 2864,2258.53 2870,2252.53 2870,2242.11 2876,2236.11 2894,2236.11 2900,2242.11 2900,2252.53 2906,2258.53 2924,2258.53 2930,2252.53 2930,2242.11 2936,2236.11 2954,2236.11 2960,2242.11 2960,2252.53 2966,2258.53 2984,2258.53 2990,2252.53 2990,2242.11 2996,2236.11 3014,2236.11 3020,2242.11 3020,2252.53 3026,2258.53 3044,2258.53 3050,2252.53 3050,2242.11 3056,2236.11 3074,2236.11 3080,2242.11 3080,2252.53 3086,2258.53 3104,2258.53 3110,2252.53 3110,2242.11 3116,2236.11 3134,2236.11 3140,2242.11 3140,2252.53 3146,2258.53 3164,2258.53 3170,2252.53 3170,2242.11 3176,2236.11 3194,2236.11 3200,2242.11 3200,2252.53 3206,2258.53 3224,2258.53 3230,2252.53 3230,2242.11 3236,2236.11 3254,2236.11 3260,2242.11 3260,2252.53 3266,2258.53 3284,2258.53 3290,2252.53 3290,2251 3296,2245 v1(3525,2245) v1@3525.79,2244.21
CRED_CRED_1_0: J1.L4 J2.A8 | length 3426.1
  TOP w10: J1.L4@1001.46,1055 1003.23,1053.23 1003.23,951 997.23,945 974.01,945 968.01,939 968.01,561 974.01,555 997.23,555 1003.23,549 v1(1003.23,496.77) ; J2.A8@3127.36,1035 3127.36,946 3121.36,940 3098.89,940 3092.89,934 3092.89,916 3098.89,910 3113.97,910 3119.97,904 3119.97,886 3113.97,880 3098.89,880 3092.89,874 3092.89,856 3098.89,850 3113.97,850 3119.97,844 3119.97,826 3113.97,820 3098.89,820 3092.89,814 3092.89,796 3098.89,790 3121.36,790 3127.36,784 3127.36,492.64 v1(3130,490)
  BOT w10: v1(1003.23,496.77) 1010,490 v1(3130,490)
CRED_MSG_0_1_0: J1.A1 J2.L11 | length 3405.9
  TOP w10: v1(700,2695) 700,2056.46 J1.A1@701.46,2055 ; J2.L11@2825.79,2055 v1@2825.79,2694.21
  BOT w10: v1(700,2695) v1(2825,2695) v1@2825.79,2694.21
CRED_MSG_0_1_1: J1.A3 J2.L9 | length 3405.5
  TOP w10: J1.A3@901.46,2055 901.46,2111.72 895.46,2117.72 866.1,2117.72 860.1,2123.72 860.1,2501.72 866.1,2507.72 895.46,2507.72 901.46,2513.72 v1(901.46,2606.46) ; v1(3025.39,2609.61) 3025.39,2055.39 J2.L9@3025.79,2055
  BOT w10: v1(901.46,2606.46) 905,2610 959,2610 965,2616 965,2632.88 971,2638.88 2669,2638.88 2675,2632.88 2675,2601.68 2681,2595.68 2699,2595.68 2705,2601.68 2705,2616.57 2711,2622.57 2729,2622.57 2735,2616.57 2735,2601.68 2741,2595.68 2759,2595.68 2765,2601.68 2765,2604 2771,2610 3025,2610 v1(3025.39,2609.61)
CRED_MSG_0_1_2: J1.A4 J2.L8 | length 3407.8
  TOP w10: J1.A4@1001.46,2055 1003.23,2056.77 1003.23,2538.23 1005,2540 v1(1010,2535) ; v1(3120,2535) 3120,2060.79 J2.L8@3125.79,2055
  BOT w10: v1(1010,2535) 2319,2535 2325,2541 2325,2541.65 2331,2547.65 2349,2547.65 2355,2541.65 2355,2528.35 2361,2522.35 2379,2522.35 2385,2528.35 2385,2541.65 2391,2547.65 2409,2547.65 2415,2541.65 2415,2528.35 2421,2522.35 2439,2522.35 2445,2528.35 2445,2541.65 2451,2547.65 2469,2547.65 2475,2541.65 2475,2528.35 2481,2522.35 2499,2522.35 2505,2528.35 2505,2541.65 2511,2547.65 2529,2547.65 2535,2541.65 2535,2528.35 2541,2522.35 2559,2522.35 2565,2528.35 2565,2541.65 2571,2547.65 2589,2547.65 2595,2541.65 2595,2528.35 2601,2522.35 2619,2522.35 2625,2528.35 2625,2541.65 2631,2547.65 2649,2547.65 2655,2541.65 2655,2528.35 2661,2522.35 2679,2522.35 2685,2528.35 2685,2541.65 2691,2547.65 2709,2547.65 2715,2541.65 2715,2528.35 2721,2522.35 2739,2522.35 2745,2528.35 2745,2541.65 2751,2547.65 2769,2547.65 2775,2541.65 2775,2528.35 2781,2522.35 2799,2522.35 2805,2528.35 2805,2541.65 2811,2547.65 2829,2547.65 2835,2541.65 2835,2528.35 2841,2522.35 2859,2522.35 2865,2528.35 2865,2529 2871,2535 v1(3120,2535)
CRED_MSG_0_1_3: J1.B4 J2.K8 | length 3493.1
  TOP w10: J1.B4@1001.46,1955 1044.17,1912.28 1537.28,1912.28 1554.38,1929.38 1554.38,1968.34 1583.76,1997.72 1828.17,1997.72 1834.17,1991.72 1834.17,1971.44 1840.17,1965.44 1978.17,1965.44 1984.17,1971.44 1984.17,2030.85 1990.17,2036.85 2008.17,2036.85 2014.17,2030.85 2014.17,1963.73 2020.17,1957.73 2038.17,1957.73 2044.17,1963.73 2044.17,2030.85 2050.17,2036.85 2068.17,2036.85 2074.17,2030.85 2074.17,1963.73 2080.17,1957.73 2098.17,1957.73 2104.17,1963.73 2104.17,2030.85 2110.17,2036.85 2128.17,2036.85 2134.17,2030.85 2134.17,1963.73 2140.17,1957.73 2158.17,1957.73 2164.17,1963.73 2164.17,2030.85 2170.17,2036.85 2188.17,2036.85 2194.17,2030.85 2194.17,1963.73 2200.17,1957.73 2218.17,1957.73 2224.17,1963.73 2224.17,2030.85 2230.17,2036.85 2248.17,2036.85 2254.17,2030.85 2254.17,1963.73 2260.17,1957.73 2278.17,1957.73 2284.17,1963.73 2284.17,2030.85 2290.17,2036.85 2308.17,2036.85 2314.17,2030.85 2314.17,1963.73 2320.17,1957.73 2338.17,1957.73 2344.17,1963.73 2344.17,2030.85 2350.17,2036.85 2368.17,2036.85 2374.17,2030.85 2374.17,1963.73 2380.17,1957.73 2398.17,1957.73 2404.17,1963.73 2404.17,2030.85 2410.17,2036.85 2428.17,2036.85 2434.17,2030.85 2434.17,1963.73 2440.17,1957.73 2458.17,1957.73 2464.17,1963.73 2464.17,2030.85 2470.17,2036.85 2488.17,2036.85 2494.17,2030.85 2494.17,2003.72 2500.17,1997.72 3083.07,1997.72 J2.K8@3125.79,1955
CRED_MSG_0_1_4: J1.A6 J2.K7 | length 3426.6
  TOP w10: J1.A6@1201.46,2055 v1(1201.46,2383.54) ; v1(3162.47,2382.53) 3180,2365 3180,2018.3 3220.59,1977.72 3220.59,1941.77 J2.K7@3227.36,1935
  BOT w10: v1(1201.46,2383.54) 1199.94,2385.06 1207.53,2382.53 1253.94,2382.53 1259.94,2388.53 1259.94,2388.59 1265.94,2394.59 1283.94,2394.59 1289.94,2388.59 1289.94,2382.75 1295.94,2376.75 1313.94,2376.75 1319.94,2382.75 1319.94,2388.59 1325.94,2394.59 1343.94,2394.59 1349.94,2388.59 1349.94,2382.75 1355.94,2376.75 1373.94,2376.75 1379.94,2382.75 1379.94,2388.59 1385.94,2394.59 1403.94,2394.59 1409.94,2388.59 1409.94,2382.75 1415.94,2376.75 1433.94,2376.75 1439.94,2382.75 1439.94,2388.59 1445.94,2394.59 1463.94,2394.59 1469.94,2388.59 1469.94,2382.75 1475.94,2376.75 1493.94,2376.75 1499.94,2382.75 1499.94,2388.59 1505.94,2394.59 1523.94,2394.59 1529.94,2388.59 1529.94,2382.75 1535.94,2376.75 1553.94,2376.75 1559.94,2382.75 1559.94,2388.59 1565.94,2394.59 1583.94,2394.59 1589.94,2388.59 1589.94,2382.75 1595.94,2376.75 1613.94,2376.75 1619.94,2382.75 1619.94,2388.59 1625.94,2394.59 1643.94,2394.59 1649.94,2388.59 1649.94,2382.75 1655.94,2376.75 1673.94,2376.75 1679.94,2382.75 1679.94,2388.59 1685.94,2394.59 1703.94,2394.59 1709.94,2388.59 1709.94,2382.75 1715.94,2376.75 1733.94,2376.75 1739.94,2382.75 1739.94,2388.59 1745.94,2394.59 1763.94,2394.59 1769.94,2388.59 1769.94,2382.75 1775.94,2376.75 1793.94,2376.75 1799.94,2382.75 1799.94,2388.59 1805.94,2394.59 1823.94,2394.59 1829.94,2388.59 1829.94,2382.75 1835.94,2376.75 1853.94,2376.75 1859.94,2382.75 1859.94,2388.59 1865.94,2394.59 1883.94,2394.59 1889.94,2388.59 1889.94,2382.75 1895.94,2376.75 1913.94,2376.75 1919.94,2382.75 1919.94,2388.59 1925.94,2394.59 1943.94,2394.59 1949.94,2388.59 1949.94,2382.75 1955.94,2376.75 1973.94,2376.75 1979.94,2382.75 1979.94,2388.59 1985.94,2394.59 2003.94,2394.59 2009.94,2388.59 2009.94,2382.75 2015.94,2376.75 2033.94,2376.75 2039.94,2382.75 2039.94,2388.59 2045.94,2394.59 2063.94,2394.59 2069.94,2388.59 2069.94,2382.75 2075.94,2376.75 2093.94,2376.75 2099.94,2382.75 2099.94,2388.59 2105.94,2394.59 2123.94,2394.59 2129.94,2388.59 2129.94,2382.75 2135.94,2376.75 2153.94,2376.75 2159.94,2382.75 2159.94,2388.59 2165.94,2394.59 2183.94,2394.59 2189.94,2388.59 2189.94,2382.75 2195.94,2376.75 2213.94,2376.75 2219.94,2382.75 2219.94,2388.59 2225.94,2394.59 2243.94,2394.59 2249.94,2388.59 2249.94,2382.75 2255.94,2376.75 2273.94,2376.75 2279.94,2382.75 2279.94,2388.59 2285.94,2394.59 2303.94,2394.59 2309.94,2388.59 2309.94,2382.75 2315.94,2376.75 2333.94,2376.75 2339.94,2382.75 2339.94,2388.59 2345.94,2394.59 2363.94,2394.59 2369.94,2388.59 2369.94,2382.75 2375.94,2376.75 2393.94,2376.75 2399.94,2382.75 2399.94,2388.59 2405.94,2394.59 2423.94,2394.59 2429.94,2388.59 2429.94,2382.75 2435.94,2376.75 2453.94,2376.75 2459.94,2382.75 2459.94,2388.59 2465.94,2394.59 2483.94,2394.59 2489.94,2388.59 2489.94,2382.75 2495.94,2376.75 2513.94,2376.75 2519.94,2382.75 2519.94,2388.59 2525.94,2394.59 2543.94,2394.59 2549.94,2388.59 2549.94,2382.75 2555.94,2376.75 2573.94,2376.75 2579.94,2382.75 2579.94,2388.59 2585.94,2394.59 2603.94,2394.59 2609.94,2388.59 2609.94,2382.75 2615.94,2376.75 2633.94,2376.75 2639.94,2382.75 2639.94,2388.59 2645.94,2394.59 2663.94,2394.59 2669.94,2388.59 2669.94,2382.75 2675.94,2376.75 2693.94,2376.75 2699.94,2382.75 2699.94,2388.59 2705.94,2394.59 2723.94,2394.59 2729.94,2388.59 2729.94,2382.75 2735.94,2376.75 2753.94,2376.75 2759.94,2382.75 2759.94,2388.59 2765.94,2394.59 2783.94,2394.59 2789.94,2388.59 2789.94,2382.75 2795.94,2376.75 2813.94,2376.75 2819.94,2382.75 2819.94,2388.59 2825.94,2394.59 2843.94,2394.59 2849.94,2388.59 2849.94,2382.75 2855.94,2376.75 2873.94,2376.75 2879.94,2382.75 2879.94,2388.59 2885.94,2394.59 2903.94,2394.59 2909.94,2388.59 2909.94,2382.75 2915.94,2376.75 2933.94,2376.75 2939.94,2382.75 2939.94,2388.59 2945.94,2394.59 2963.94,2394.59 2969.94,2388.59 2969.94,2382.75 2975.94,2376.75 2993.94,2376.75 2999.94,2382.75 2999.94,2388.59 3005.94,2394.59 3023.94,2394.59 3029.94,2388.59 3029.94,2382.75 3035.94,2376.75 3053.94,2376.75 3059.94,2382.75 3059.94,2388.59 3065.94,2394.59 3083.94,2394.59 3089.94,2388.59 3089.94,2388.53 3095.94,2382.53 v1(3162.47,2382.53)
CRED_MSG_0_1_5: J1.A5 J2.L7 | length 3421.5
  TOP w10: v1(1100.73,2439.27) 1100.73,2055.73 J1.A5@1101.46,2055 ; J2.L7@3227.36,2035 3227.36,2312.36 3292.5,2377.5 v1(3292.5,2437.5)
  BOT w10: v1(1100.73,2439.27) 1102.5,2437.5 2474,2437.5 2480,2443.5 2480,2448.19 2486,2454.19 2504,2454.19 2510,2448.19 2510,2435.17 2516,2429.17 2534,2429.17 2540,2435.17 2540,2448.19 2546,2454.19 2564,2454.19 2570,2448.19 2570,2435.17 2576,2429.17 2594,2429.17 2600,2435.17 2600,2448.19 2606,2454.19 2624,2454.19 2630,2448.19 2630,2435.17 2636,2429.17 2654,2429.17 2660,2435.17 2660,2448.19 2666,2454.19 2684,2454.19 2690,2448.19 2690,2435.17 2696,2429.17 2714,2429.17 2720,2435.17 2720,2448.19 2726,2454.19 2744,2454.19 2750,2448.19 2750,2435.17 2756,2429.17 2774,2429.17 2780,2435.17 2780,2448.19 2786,2454.19 2804,2454.19 2810,2448.19 2810,2435.17 2816,2429.17 2834,2429.17 2840,2435.17 2840,2448.19 2846,2454.19 2864,2454.19 2870,2448.19 2870,2435.17 2876,2429.17 2894,2429.17 2900,2435.17 2900,2448.19 2906,2454.19 2924,2454.19 2930,2448.19 2930,2435.17 2936,2429.17 2954,2429.17 2960,2435.17 2960,2448.19 2966,2454.19 2984,2454.19 2990,2448.19 2990,2435.17 2996,2429.17 3014,2429.17 3020,2435.17 3020,2448.19 3026,2454.19 3044,2454.19 3050,2448.19 3050,2435.17 3056,2429.17 3074,2429.17 3080,2435.17 3080,2448.19 3086,2454.19 3104,2454.19 3110,2448.19 3110,2435.17 3116,2429.17 3134,2429.17 3140,2435.17 3140,2448.19 3146,2454.19 3164,2454.19 3170,2448.19 3170,2443.5 3176,2437.5 v1(3292.5,2437.5)
CRED_MSG_0_1_6: J1.C6 J2.J6 | length 3490.4
  TOP w10: J1.C6@1201.46,1855 1271.46,1785 1305.46,1785 1311.46,1791 1311.46,1794.62 1317.46,1800.62 1335.46,1800.62 1341.46,1794.62 1341.46,1788.53 1347.46,1782.53 1365.46,1782.53 1371.46,1788.53 1371.46,1794.66 1377.46,1800.66 1395.46,1800.66 1401.46,1794.66 1401.46,1788.53 1407.46,1782.53 1425.46,1782.53 1431.46,1788.53 1431.46,1794.66 1437.46,1800.66 1455.46,1800.66 1461.46,1794.66 1461.46,1791 1467.46,1785 1525,1785 1540,1800 1745,1800 1790,1755 1824,1755 1830,1761 1830,1788.91 1836,1794.91 1854,1794.91 1860,1788.91 1860,1766.91 1866,1760.91 1884,1760.91 1890,1766.91 1890,1788.91 1896,1794.91 1914,1794.91 1920,1788.91 1920,1766.91 1926,1760.91 1944,1760.91 1950,1766.91 1950,1788.91 1956,1794.91 1974,1794.91 1980,1788.91 1980,1766.91 1986,1760.91 2004,1760.91 2010,1766.91 2010,1788.91 2016,1794.91 2034,1794.91 2040,1788.91 2040,1766.91 2046,1760.91 2064,1760.91 2070,1766.91 2070,1788.91 2076,1794.91 2094,1794.91 2100,1788.91 2100,1766.91 2106,1760.91 2124,1760.91 2130,1766.91 2130,1788.91 2136,1794.91 2154,1794.91 2160,1788.91 2160,1766.91 2166,1760.91 2184,1760.91 2190,1766.91 2190,1788.91 2196,1794.91 2214,1794.91 2220,1788.91 2220,1766.91 2226,1760.91 2244,1760.91 2250,1766.91 2250,1788.91 2256,1794.91 2274,1794.91 2280,1788.91 2280,1766.91 2286,1760.91 2304,1760.91 2310,1766.91 2310,1788.91 2316,1794.91 2334,1794.91 2340,1788.91 2340,1766.91 2346,1760.91 2364,1760.91 2370,1766.91 2370,1788.91 2376,1794.91 2394,1794.91 2400,1788.91 2400,1766.91 2406,1760.91 2424,1760.91 2430,1766.91 2430,1788.91 2436,1794.91 2454,1794.91 2460,1788.91 2460,1766.91 2466,1760.91 2484,1760.91 2490,1766.91 2490,1788.91 2496,1794.91 2514,1794.91 2520,1788.91 2520,1766.91 2526,1760.91 2544,1760.91 2550,1766.91 2550,1788.91 2556,1794.91 2574,1794.91 2580,1788.91 2580,1766.91 2586,1760.91 2604,1760.91 2610,1766.91 2610,1788.91 2616,1794.91 2634,1794.91 2640,1788.91 2640,1766.91 2646,1760.91 2664,1760.91 2670,1766.91 2670,1788.91 2676,1794.91 2694,1794.91 2700,1788.91 2700,1761 2706,1755 2760,1755 2810,1805 2969.14,1805 2975,1799.14 2975,1760 2981,1754 2999,1754 3005,1760 3005,1835.44 3011,1841.44 3029,1841.44 3035,1835.44 3035,1760 3041,1754 3059,1754 3065,1760 3065,1835.44 3071,1841.44 3089,1841.44 3095,1835.44 3095,1760 3101,1754 3119,1754 3125,1760 3125,1774 3131,1780 3272.36,1780 J2.J6@3327.36,1835
CRED_MSG_0_1_7: J1.B6 J2.J5 | length 3443.1
  BOT w10: J1.B6@1201.46,1955 1258.74,1897.72 1292.74,1897.72 1298.74,1903.72 1298.74,1905.28 1304.74,1911.28 1322.74,1911.28 1328.74,1905.28 1328.74,1903.72 1334.74,1897.72 1370.04,1897.72 1456.38,1811.38 1490.24,1811.38 1496.24,1817.38 1496.24,1833.34 1502.24,1839.34 1520.24,1839.34 1526.24,1833.34 1526.24,1796.81 1532.24,1790.81 1550.24,1790.81 1556.24,1796.81 1556.24,1806.28 1562.24,1812.28 1580.24,1812.28 1586.24,1806.28 1586.24,1804.72 1592.24,1798.72 1610.24,1798.72 1616.24,1804.72 1616.24,1806.28 1622.24,1812.28 1640.24,1812.28 1646.24,1806.28 1646.24,1804.72 1652.24,1798.72 1670.24,1798.72 1676.24,1804.72 1676.24,1805.38 1682.24,1811.38 1718.62,1811.38 1745,1785 1789,1785 1795,1791 1795,1800.12 1801,1806.12 1819,1806.12 1825,1800.12 1825,1782.15 1831,1776.15 1849,1776.15 1855,1782.15 1855,1800.12 1861,1806.12 1879,1806.12 1885,1800.12 1885,1782.15 1891,1776.15 1909,1776.15 1915,1782.15 1915,1800.12 1921,1806.12 1939,1806.12 1945,1800.12 1945,1782.15 1951,1776.15 1969,1776.15 1975,1782.15 1975,1800.12 1981,1806.12 1999,1806.12 2005,1800.12 2005,1782.15 2011,1776.15 2029,1776.15 2035,1782.15 2035,1800.12 2041,1806.12 2059,1806.12 2065,1800.12 2065,1782.15 2071,1776.15 2089,1776.15 2095,1782.15 2095,1800.12 2101,1806.12 2119,1806.12 2125,1800.12 2125,1782.15 2131,1776.15 2149,1776.15 2155,1782.15 2155,1800.12 2161,1806.12 2179,1806.12 2185,1800.12 2185,1782.15 2191,1776.15 2209,1776.15 2215,1782.15 2215,1800.12 2221,1806.12 2239,1806.12 2245,1800.12 2245,1782.15 2251,1776.15 2269,1776.15 2275,1782.15 2275,1800.12 2281,1806.12 2299,1806.12 2305,1800.12 2305,1782.15 2311,1776.15 2329,1776.15 2335,1782.15 2335,1800.12 2341,1806.12 2359,1806.12 2365,1800.12 2365,1782.15 2371,1776.15 2389,1776.15 2395,1782.15 2395,1800.12 2401,1806.12 2419,1806.12 2425,1800.12 2425,1782.15 2431,1776.15 2449,1776.15 2455,1782.15 2455,1800.12 2461,1806.12 2479,1806.12 2485,1800.12 2485,1782.15 2491,1776.15 2509,1776.15 2515,1782.15 2515,1800.12 2521,1806.12 2539,1806.12 2545,1800.12 2545,1782.15 2551,1776.15 2569,1776.15 2575,1782.15 2575,1800.12 2581,1806.12 2599,1806.12 2605,1800.12 2605,1782.15 2611,1776.15 2629,1776.15 2635,1782.15 2635,1800.12 2641,1806.12 2659,1806.12 2665,1800.12 2665,1782.15 2671,1776.15 2689,1776.15 2695,1782.15 2695,1800.12 2701,1806.12 2719,1806.12 2725,1800.12 2725,1782.15 2731,1776.15 2749,1776.15 2755,1782.15 2755,1785.91 2761,1791.91 2779,1791.91 2785,1785.91 2801.29,1785.91 2813.09,1797.72 2854.82,1797.72 2866.63,1785.91 2875,1785.91 2881,1791.91 2899,1791.91 2909.81,1802.72 2948.19,1802.72 2965,1785.91 2965,1783.84 2971,1777.84 2989,1777.84 2995,1783.84 2995,1785.91 3001,1791.91 3019,1791.91 3025,1785.91 3025,1766.94 3031,1760.94 3049,1760.94 3055,1766.94 3055,1785.91 3061,1791.91 3079,1791.91 3085,1785.91 3085,1766.94 3091,1760.94 3109,1760.94 3115,1766.94 3115,1785.91 3121,1791.91 3139,1791.91 3145,1785.91 3145,1766.94 3151,1760.94 3169,1760.94 3175,1766.94 3175,1785.91 3181,1791.91 3199,1791.91 3205,1785.91 3205,1766.94 3211,1760.94 3229,1760.94 3235,1766.94 3235,1785.91 3241,1791.91 3259,1791.91 3265,1785.91 3265,1766.94 3271,1760.94 3289,1760.94 3295,1766.94 3295,1779 3301,1785 3355.79,1785 J2.J5@3425.79,1855